# Altium PCB Controller_TRK_hv2.PcbDoc (part 2 of 2)
Units mm, origin at the board's own origin, x right, y up, seen from the top; angles counter-clockwise.
Board outline 95.06 x 95 mm, 2 copper layers (Top Layer, Bottom Layer); 179 components, 122 nets, 486 pads, 332 vias.
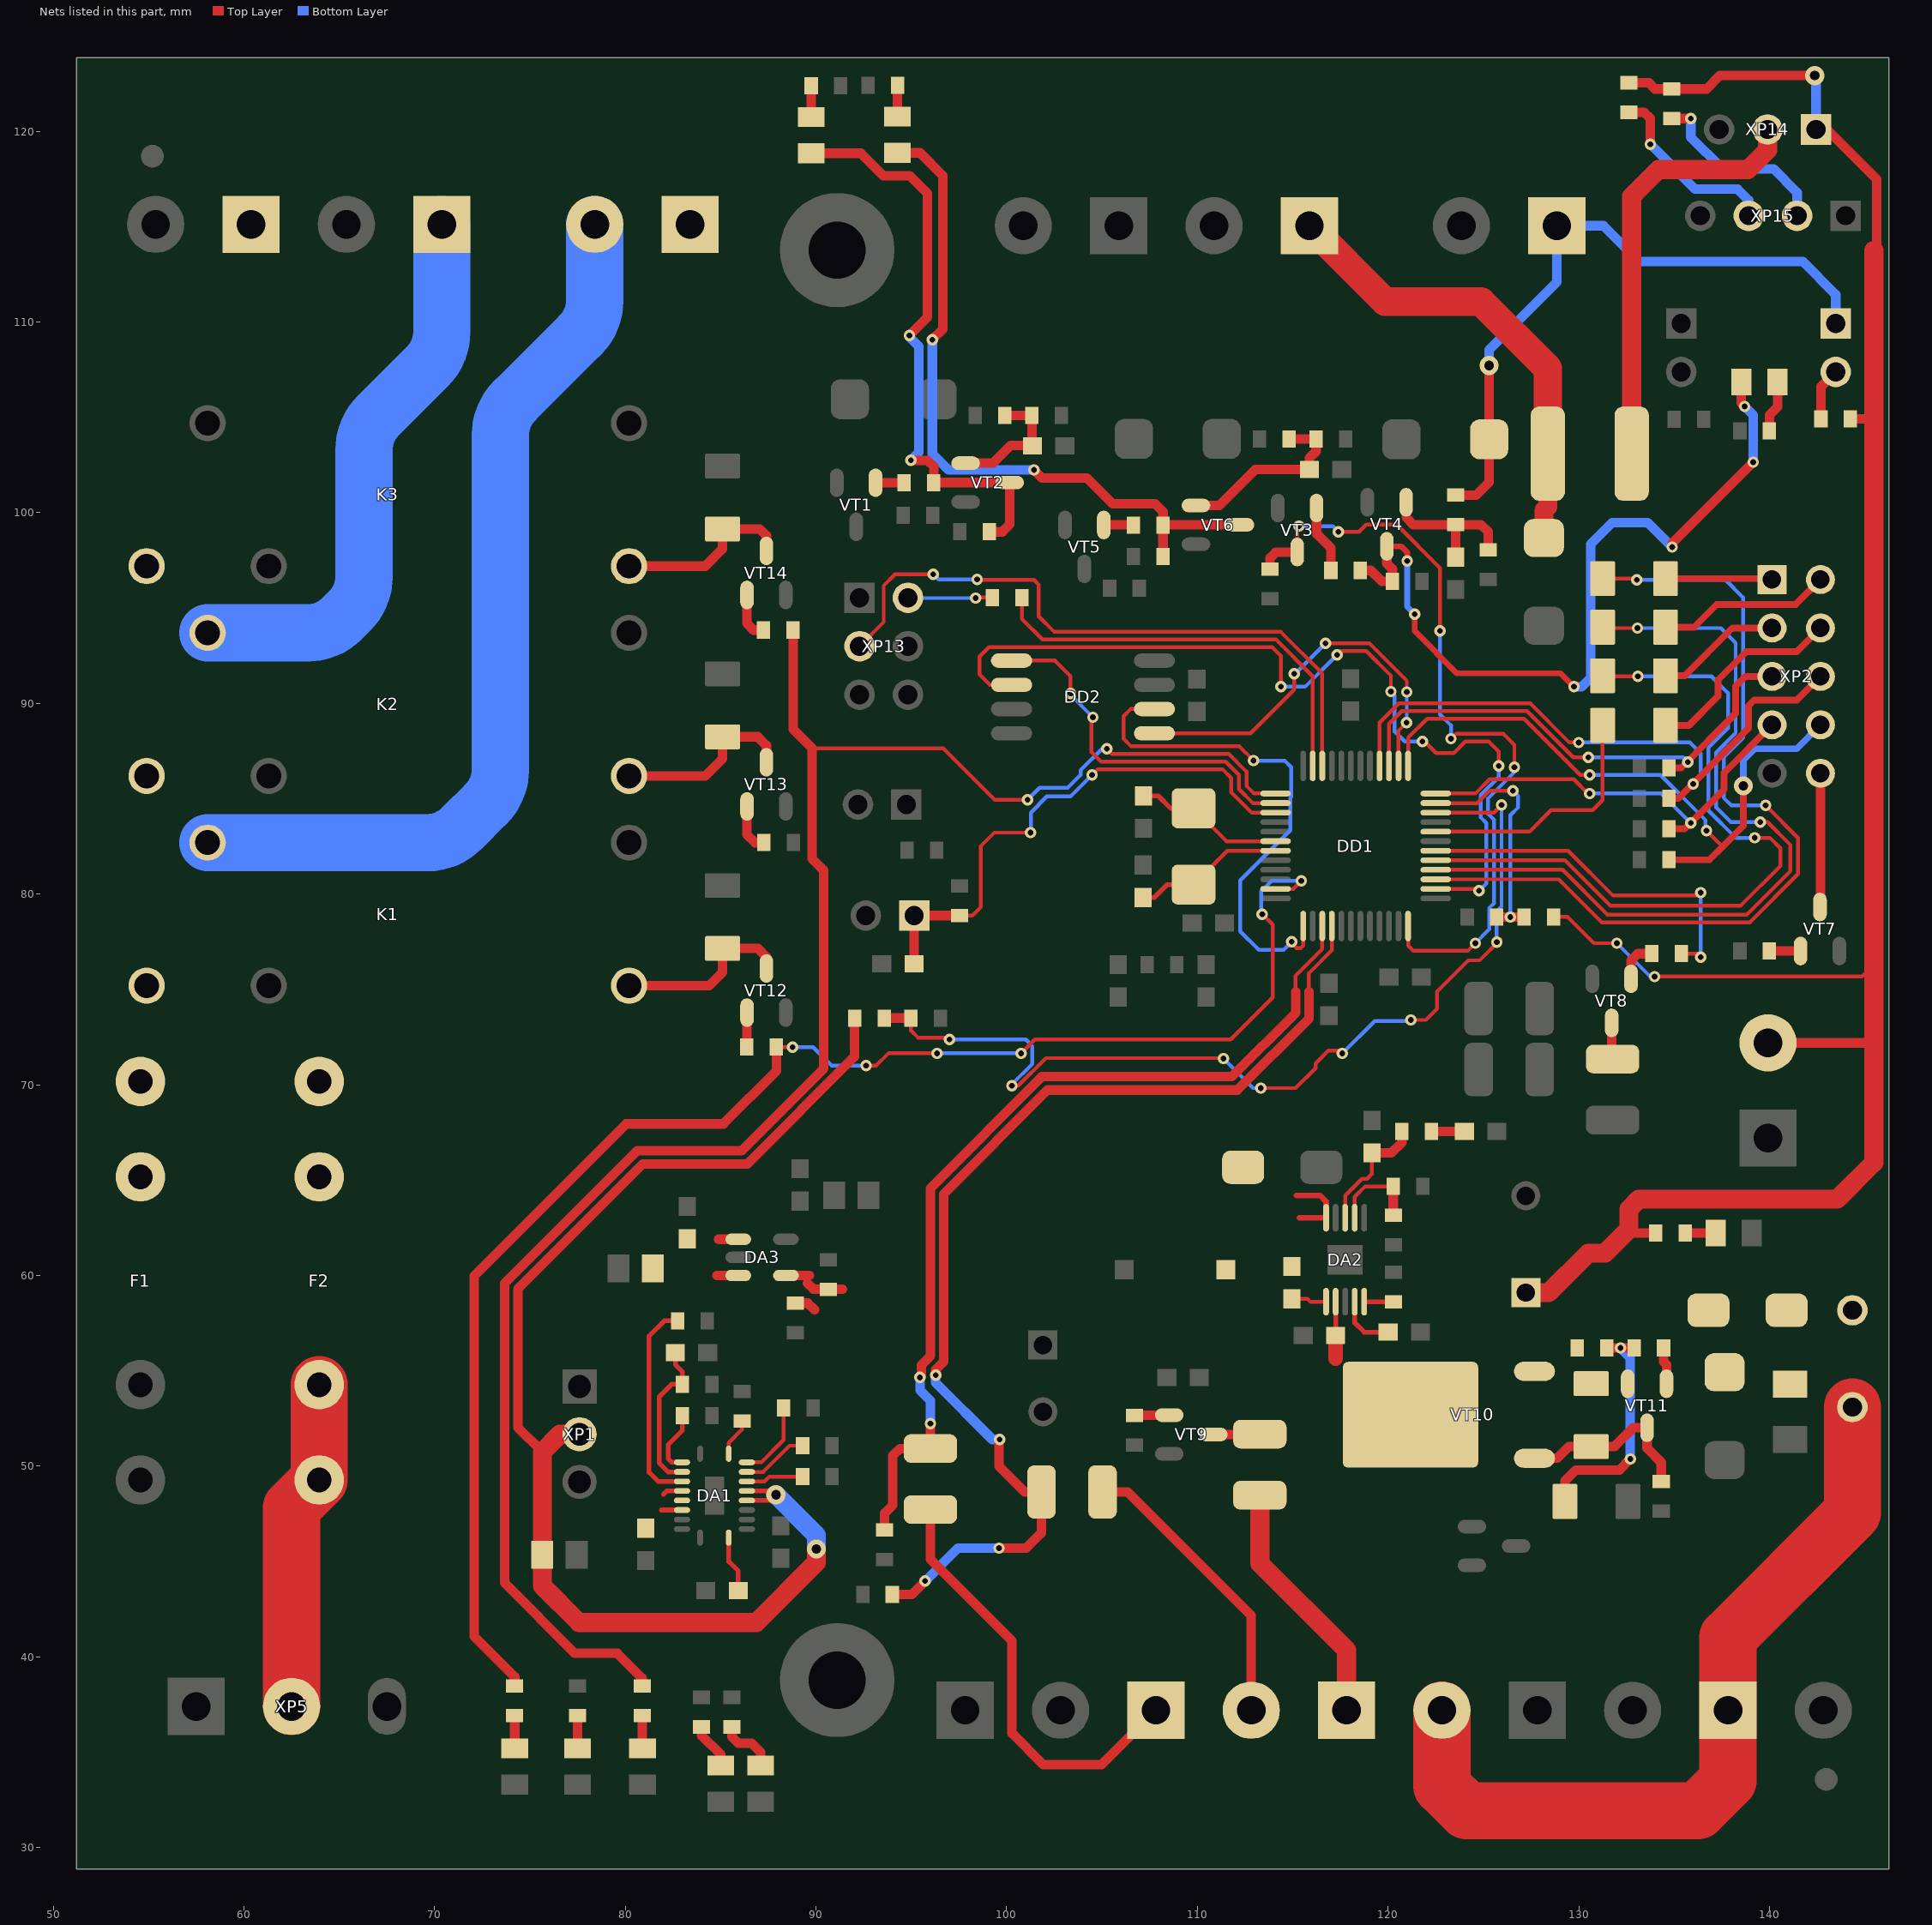
[diagram p2: the nets of this part, all layers, seen from the top]

## Via types
v1: diameter 0.6, hole 0.3, Top Layer to Bottom Layer, tented both sides, 300 vias
v2: diameter 1, hole 0.5, Top Layer to Bottom Layer, tented both sides, 32 vias

## Nets (pads, with @x,y where several pads share a name; then routed paths per layer and width w, separated by ;. In a path a pad name is that pad's centre, name@x,y a point inside that pad or via, vN(x,y) a via of type N, cw(c..) or ccw(c..) an arc to the next point about the centre after c; other vN are vias at no path point) (continued)
M_VALVE_RELAY: DD1.11 R51.1 R52.1 | length 81.6
  Top Layer w0.2: R51.1@87.925,71.975 v1(88.775,71.975) ; v1(92.625,71) 93.15,71 93.8,71.65 v1(96.35,71.65) ; v1(100.75,71.65) 101.475,72.375 111.75,72.375 113.95,74.575 113.95,78.4 v1(113.4,78.95) ; DD1.11@114.1,80.275 115.025,80.275 v1(115.45,80.7)
  Top Layer w0.5: R52.1@74.2,38.475 74.2,38.95 72.075,41.075 72.075,59.975 80.05,67.95 85.15,67.95 87.925,70.725 R51.1@87.925,71.975
  Bottom Layer w0.2: v1(88.775,71.975) 89.85,71.975 90.825,71 v1(92.625,71) ; v1(96.35,71.65) v1(100.75,71.65) ; v1(113.4,78.95) 113.35,78.9 113.35,80.15 113.9,80.7 v1(115.45,80.7)
MAIN_L: K2.11 XP7.1 | length 29.8
  Bottom Layer w3: K2.11@58.1,93.7 63.348,93.7 ccw(c63.348,96.24) 65.144,94.444 65.556,94.856 ccw(c63.76,96.652) 66.3,96.652 66.3,103.298 cw(c68.84,103.298) 67.044,105.094 69.631,107.681 ccw(c67.835,109.477) 70.375,109.477 XP7.1@70.375,115.125
MISO: DD1.26 DD2.2 | length 47.6
  Top Layer w0.2: DD2.2@100.232,90.95 DD2.2@100.257,90.975 99.125,90.975 98.575,91.525 98.575,92.45 99.075,92.95 113.925,92.95 114.375,92.5 v1(114.375,90.875) ; v1(117.325,92.55) 117.525,92.75 118.859,92.75 120.15,91.459 v1(120.15,90.625) ; v1(121.8,88) 121.8,88.075 121.825,88.1 122.525,87.4 123.45,87.4 124.05,88 125.275,88 125.8,87.475 v1(125.8,86.725) ; DD1.26@122.5,80.275 124.675,80.275 v1(124.775,80.175)
  Bottom Layer w0.2: v1(114.375,90.875) 115.65,90.875 v1(117.325,92.55) ; v1(120.15,90.625) 120.35,90.425 120.35,88.525 120.875,88 v1(121.8,88) ; v1(124.775,80.175) 125.15,80.55 125.15,83.734 124.85,84.034 124.85,85.191 125.8,86.141 v1(125.8,86.725)
MOSI: DD1.38 DD2.5 | length 21.1
  Top Layer w0.2: DD2.5@107.75,88.435 112.785,88.435 115.075,90.725 v1(115.075,91.55) ; v1(116.725,93.15) 119.025,93.15 120.981,91.194 v1(120.981,90.604) ; DD1.38@120.55,86.725 120.55,88.575 v1(120.975,89)
  Bottom Layer w0.2: v1(115.075,91.55) 115.125,91.55 v1(116.725,93.15) ; v1(120.975,89) 120.981,89.006 v1(120.981,90.604)
N: F2.1 XP5.2 | length 17.5
  Top Layer w3: XP5.2@62.5,37.4 62.5,47.825 F2.1@63.95,49.275 F2.1@63.95,54.275
N_OUT: F2.2 XP6.1 XP18.1
NetC1_1: C1.1 DA1.1 | length 3
  Top Layer w0.25: DA1.1@85.425,46.25 85.425,45 85.925,44.5 C1.1@85.925,43.475
NetC4_2: C4.2 DA1.5 DA1.6 R12.2 XP1.2 | length 67.3
  Top Layer w0.2: v2@87.6,48.2 v2(87.9,48.5) v2@87.7,48.7
  Top Layer w0.25: DA1.5@86.375,48.2 v2@87.6,48.2 ; DA1.6@86.375,48.7 v2@87.7,48.7
  Top Layer w0.5: 75.65,50.75 74.375,52.025 74.375,59.305 80.92,65.85 86.396,65.85 92.025,71.479 R12.2@92.025,73.5
  Top Layer w1: XP1.2@77.6,51.675 76.575,51.675 75.65,50.75 C4.2@75.65,45.35 75.65,43.725 77.575,41.8 86.875,41.8 90.025,44.95 v2(90.025,45.65)
  Bottom Layer w1: v2(87.9,48.5) 90.025,46.375 v2(90.025,45.65)
NetC5_1: C5.1 DA1.13 R7.1 | length 8.2
  Top Layer w0.25: C5.1@82.625,55.95 82.625,55.325 83,54.95 R7.1@83,54.3 82.45,54.3 81.775,53.625 81.775,50.175 82.25,49.7 DA1.13@82.975,49.7
NetC15_2: C15.2 R42.2 VD11.2 VD12.2 VD13.2 VT10.3 VT11.2
NetC16_1: C16.1 DA2.10 L1.1 VD16.2 | length 3.9
  Top Layer w0.3: 115.2,64.2 116.425,64.2 116.75,63.875 DA2.10@116.75,63.025 115.362,63.025
NetC16_2: C16.2 DA2.1 | length 1.8
  Top Layer w0.2: C16.2@114.95,58.775 115.775,58.775 115.925,58.625 DA2.1@116.725,58.625
NetC20_1: C20.1 DA2.4 | length 3.1
  Top Layer w0.25: DA2.4@118.275,58.075 118.275,58.322 118.25,58.347 118.25,57.525 118.75,57.025 C20.1@120,57.025
NetC21_1: C21.1 DA2.8 R46.2 | length 6.5
  Top Layer w0.2: DA2.8@117.75,63.025 117.75,64.191 118.634,65.075 118.9,65.075 119.15,65.325 C21.1@119.15,66.425
  Top Layer w0.5: C21.1@119.15,66.425 120.175,66.425 120.726,66.976 R46.2@120.726,67.55
NetC22_1: C22.1 R46.1 | length 1.7
  Top Layer w0.5: R46.1@122.275,67.55 C22.1@124,67.55
NetC28_2: C28.2 R21.2 R23.2 VT2.1 | length 6.9
  Top Layer w0.5: VT2.1@97.85,102.6 99.275,102.6 100.199,103.524 101.326,103.524 R23.2@101.326,105.1 R21.2@99.899,105.1
NetC29_2: C29.2 R27.2 R28.2 VT4.1 | length 8.1
  Top Layer w0.5: VT4.1@120.95,100.55 120.95,99.75 121.324,99.376 R27.2@123.55,99.376 ; C29.2@123.55,97.675 R27.2@123.55,99.376 ; R28.2@125.25,98.049 125.25,99 124.874,99.376 R27.2@123.55,99.376
NetC30_2: C30.2 R33.2 R34.2 VT6.1 | length 9.9
  Top Layer w0.5: VT6.1@109.925,100.382 111.157,100.382 113.05,102.275 C30.2@115.875,102.275 115.875,102.875 116.226,103.226 R34.2@116.226,103.875 R33.2@114.799,103.875
NetDA1_7: DA1.7 R2.1 | length 3
  Top Layer w0.2: DA1.7@86.375,49.2 87.3,49.2 87.55,49.45 R2.1@89.3,49.45
NetDA1_8: DA1.8 R5.1 | length 3.5
  Top Layer w0.2: DA1.8@86.375,49.7 87.234,49.7 88.609,51.075 R5.1@89.3,51.075
NetDA1_9: DA1.9 R3.1 | length 4.1
  Top Layer w0.2: DA1.9@86.375,50.2 87.125,50.2 88.3,51.375 R3.1@88.3,53.05
NetDA1_10: DA1.10 R6.1 | length 2
  Top Layer w0.2: DA1.10@85.425,50.65 85.425,51.225 86.125,51.925 R6.1@86.125,52.375
NetDA1_12: DA1.12 R4.1 | length 3.4
  Top Layer w0.25: DA1.12@82.975,50.2 82.45,50.2 82.25,50.4 82.25,51.125 83,51.875 R4.1@83,52.65
NetDA1_14: DA1.14 R1.1 | length 10.9
  Top Layer w0.25: R1.1@82.75,57.625 82.05,57.625 81.25,56.825 81.25,49.675 81.725,49.2 DA1.14@82.975,49.2
NetDA2_5: DA2.5 R47.2 | length 1.5
  Top Layer w0.25: DA2.5@118.75,58.625 R47.2@120.275,58.626
NetDA2_7: DA2.7 R45.1 R48.2 | length 4.9
  Top Layer w0.2: DA2.7@118.25,63.025 118.25,64.125 118.8,64.675 R45.1@120.275,64.675
  Top Layer w0.5: R48.2@120.275,63.149 R45.1@120.275,64.675
NetDA3_4: DA3.4 R49.1 R50.2 | length 4.4
  Top Layer w0.5: DA3.4@88.425,60 89.65,60 ; R50.2@88.925,58.549 89.575,58.549 89.925,58.2 ; 89.55,59.6 89.875,59.275 R49.1@90.65,59.275 91.4,59.275
NetDD1_27: DD1.27 VD6.2 | length 46.4
  Top Layer w0.2: DD1.27@122.5,80.775 128.95,80.775 131.2,78.525 138.975,78.525 141.5,81.05 141.5,82.95 v1(139.8,84.65) ; VD6.2@131.249,96.55 132.975,96.55 v1(133.05,96.475)
  Bottom Layer w0.2: v1(133.05,96.475) 137.7,96.475 138.625,95.55 138.625,88.2 137.6,87.175 137.6,85.05 138,84.65 v1(139.8,84.65)
NetDD1_28: DD1.28 VD8.2 | length 43
  Top Layer w0.2: DD1.28@122.5,81.275 129.15,81.275 131.5,78.925 138.809,78.925 141.1,81.216 141.1,82.575 139.9,83.775 v1(139.525,83.775) ; VD8.2@131.249,94 131.299,93.95 v1(133.075,93.95)
  Bottom Layer w0.2: v1(133.075,93.95) 137.45,93.95 138.225,93.175 138.225,88.45 137.2,87.425 137.2,84.55 137.975,83.775 v1(139.525,83.775)
NetDD1_29: DD1.29 VD7.2 | length 39
  Top Layer w0.2: DD1.29@122.5,81.775 129.275,81.775 131.65,79.4 138.5,79.4 140.575,81.475 140.575,82.4 140.021,82.954 v1(139.232,82.954) ; VD7.2@131.249,91.45 131.274,91.425 v1(133.1,91.425)
  Bottom Layer w0.2: v1(133.1,91.425) 136.95,91.425 137.825,90.55 137.825,88.7 136.8,87.675 136.8,84.384 138.23,82.954 v1(139.232,82.954)
NetDD1_30: DD1.30 R40.1 | length 19.4
  Top Layer w0.2: DD1.30@122.5,82.275 129.45,82.275 131.8,79.925 136.25,79.925 v1(136.4,80.075) ; R40.1@135.375,76.875 136.225,76.875 v1(136.4,76.7)
  Bottom Layer w0.2: v1(136.4,76.7) v1(136.4,80.075)
NetDD1_32: DD1.32 VD9.2 | length 13.4
  Top Layer w0.2: DD1.32@122.5,83.275 127.425,83.275 128.55,84.4 130.724,84.4 131.249,84.925 VD9.2@131.249,88.85
NetDD1_36: DD1.36 R37.2 XP2.7 | length 22.8
  Top Layer w0.2: DD1.36@122.5,85.275 124.575,85.275 125.325,86.025 129.734,86.025 130.484,85.275 v1(130.575,85.275)
  Top Layer w0.35: R37.2@134.724,83.425 135.55,83.425 137.625,85.5 137.625,86.365 XP2.7@140.135,88.875
  Bottom Layer w0.2: v1(130.575,85.275) 134.325,85.275 v1(135.875,83.725)
NetDD1_37: DD1.37 R36.2 XP2.8 | length 34.4
  Top Layer w0.2: DD1.37@121.05,86.725 121.05,88.2 122.05,89.2 127.125,89.2 130.075,86.25 v1(130.575,86.25) ; v1(136.7,83.325) 137.475,82.55 137.6,82.55
  Top Layer w0.35: R36.2@134.724,81.8 136.85,81.8 137.6,82.55 138.625,83.575 v2(138.625,85.675)
  Bottom Layer w0.2: v1(130.575,86.25) 134.275,86.25 136.65,83.875 136.65,83.375 v1(136.7,83.325)
  Bottom Layer w0.35: v2(138.625,85.675) 138.625,87.025 139.225,87.625 141.425,87.625 XP2.8@142.675,88.875
NetDD1_39: DD1.39 R39.2 XP2.5 | length 27.5
  Top Layer w0.2: DD1.39@120.05,86.725 120.05,88.924 120.726,89.6 127.291,89.6 129.716,87.175 v1(130.5,87.175)
  Top Layer w0.35: R39.2@134.724,86.625 135.375,86.625 138.225,89.475 138.225,90.9 138.74,91.415 XP2.5@140.135,91.415
  Bottom Layer w0.2: v1(130.5,87.175) 135.475,87.175 v1(135.725,86.925)
NetDD1_40: DD1.40 R38.2 XP2.6 | length 33.7
  Top Layer w0.2: DD1.40@119.55,86.725 119.55,88.989 120.561,90 127.456,90 129.506,87.95 v1(130,87.95)
  Top Layer w0.35: R38.2@134.724,85.025 135.225,85.025 138.898,88.698 138.898,89.873 139.203,90.178 141.438,90.178 XP2.6@142.675,91.415
  Bottom Layer w0.2: v1(130,87.95) 135.825,87.95 136.4,87.375 136.4,86.175 v1(136,85.775)
NetF1_2: F1.2 K1.14 K2.14 K3.14
NetFU1_1: FU1.1 XP12.1 | length 22.9
  Top Layer w0.5: FU1.1@96,47.725 96,45.125 100.275,40.85 100.275,36 101.925,34.35 104.975,34.35 XP12.1@107.825,37.2
NetFU2_1: FU2.1 XP12.2 | length 15.5
  Top Layer w0.5: FU2.1@105.025,48.65 106.35,48.65 112.825,42.175 XP12.2@112.825,37.2
NetFU5_1: FU5.1 VT8.3 | length 1.9
  Top Layer w0.5: VT8.3@131.725,73.25 131.725,71.4 FU5.1@131.775,71.35
NetFU6_1: FU6.1 XP14.2 | length 22.7
  Top Layer w1: FU6.1@132.775,103.1 132.775,116.592 134.183,118 138.875,118 139.9,119.025 XP14.2@139.9,120.1
NetFU7_1: FU7.1 VT9.3 | length 2.4
  Top Layer w0.5: VT9.3@110.836,51.659 113.259,51.659 FU7.1@113.275,51.675
NetFU7_2: FU7.2 XP16.1 | length 13.2
  Top Layer w1: FU7.2@113.275,48.475 113.275,44.9 117.825,40.35 XP16.1@117.825,37.2
NetFU8_2: FU8.2 VD11.1
NetJ4_2: J4.2 R22.1 | length 2.8
  Top Layer w0.5: R22.1@142.7,104.925 142.7,106.61 J4.2@143.475,107.385
NetK1_2: K1.2 VD17.1 VT12.3 | length 9.5
  Top Layer w0.5: K1.2@80.2,75.2 84.4,75.2 85.1,75.9 VD17.1@85.1,77.149 86.951,77.149 87.4,76.7 VT12.3@87.4,76.1
NetK2_2: K2.2 VD19.1 VT13.3 | length 9.8
  Top Layer w0.5: K2.2@80.2,86.2 84.2,86.2 85.1,87.1 VD19.1@85.1,88.249 86.951,88.249 87.4,87.8 VT13.3@87.4,86.911
NetK3_2: K3.2 VD20.1 VT14.3 | length 9.6
  Top Layer w0.5: K3.2@80.2,97.2 84.2,97.2 85.1,98.1 VD20.1@85.1,99.149 87.051,99.149 87.4,98.8 VT14.3@87.4,98
NetR8_1: R8.1 VD1.1 | length 2.4
  Top Layer w0.5: R8.1@84,36.325 84,35.875 85,34.875 VD1.1@85,34.3
NetR9_1: R9.1 VD2.1 | length 3.1
  Top Layer w0.5: R9.1@85.6,36.325 85.6,35.8 85.925,35.475 86.625,35.475 87.1,35 VD2.1@87.1,34.3
NetR10_2: R10.2 XP13.2 | length 4.4
  Top Layer w0.2: v1(98.375,95.525) 98.4,95.55 R10.2@99.251,95.55
  Bottom Layer w0.2: XP13.2@94.825,95.54 94.84,95.525 v1(98.375,95.525)
NetR17_1: R17.1 XP15.2 | length 10
  Top Layer w0.5: R17.1@134.875,120.675 v1(135.875,120.675)
  Bottom Layer w0.5: v1(135.875,120.675) 135.875,119.7 137.55,118.025 140.225,118.025 141.45,116.8 XP15.2@141.45,115.575
NetR19_1: R19.1 R20.1 VD23.2 VT2.3 | length 31.3
  Top Layer w0.5: VD23.2@89.75,118.85 92.35,118.85 93.525,117.675 94.925,117.675 95.85,116.75 95.85,110.25 v1(94.9,109.3) ; v1(94.975,102.75) 95.85,102.75 96.175,102.425 R20.1@96.175,101.575 96.184,101.584 99.15,101.584 VT2.3@100.161,101.584 100.161,99.386 99.775,99 R19.1@99.1,99
  Bottom Layer w0.5: v1(94.9,109.3) 94.9,109.214 95.4,108.714 95.4,103.175 v1(94.975,102.75)
NetR20_2: R20.2 VT1.1 | length 1.5
  Top Layer w0.5: VT1.1@93.125,101.575 R20.2@94.626,101.575
NetR25_1: R25.1 R26.1 VD24.2 VT4.3 | length 42.9
  Top Layer w0.3: VT4.3@119.934,98.239 120.686,98.239 121,97.925 v1(121,97.475) ; v1(121.4,94.675) 121.4,93.792 123.617,91.575 129.05,91.575 v1(129.75,90.875)
  Top Layer w0.5: R26.1@118.55,96.975 119.1,96.975 119.675,96.4 R25.1@120.225,96.4 120.225,97.05 119.934,97.341 VT4.3@119.934,98.239 ; v1(134.9,98.2) 134.9,98.4 v1(139.15,102.65) ; VD24.2@138.525,106.85 138.525,105.75 v1(138.7,105.575)
  Bottom Layer w0.3: v1(121,97.475) 121,95.075 v1(121.4,94.675)
  Bottom Layer w0.5: v1(129.75,90.875) 130.15,90.875 130.625,91.35 130.625,98.35 131.75,99.475 133.625,99.475 v1(134.9,98.2) ; v1(138.7,105.575) 139.15,105.125 v1(139.15,102.65)
NetR26_2: R26.2 VT3.1 | length 3.6
  Top Layer w0.5: VT3.1@116.25,100.25 116.25,98.9 117.001,98.149 R26.2@117.001,96.975
NetR29_1: R29.1 XP15.3 | length 10
  Top Layer w0.5: R29.1@132.625,121 133.425,121 133.75,120.675 v1(133.75,119.325) ; XP15.3@138.91,115.385 XP15.3@138.91,115.575
  Bottom Layer w0.5: v1(133.75,119.325) 136.1,116.975 138.325,116.975 138.91,116.39 XP15.3@138.91,115.575
NetR31_1: R31.1 R32.1 VD25.2 VT6.3 | length 37.4
  Top Layer w0.5: VD25.2@94.275,118.875 95.45,118.875 96.65,117.675 96.65,109.625 v1(96.1,109.075) ; v1(101.425,102.25) 101.85,101.825 104.214,101.825 105.564,100.475 107.775,100.475 108.2,100.05 R32.1@108.2,99.35 ; R31.1@108.2,97.7 R32.1@108.2,99.35 ; VT6.3@112.236,99.366 108.216,99.366 R32.1@108.2,99.35
  Bottom Layer w0.5: v1(96.1,109.075) 96.1,103.1 96.95,102.25 v1(101.425,102.25)
NetR32_2: R32.2 VT5.1 | length 1.6
  Top Layer w0.5: VT5.1@105.091,99.361 106.639,99.361 R32.2@106.651,99.35
NetR35_2: R35.2 VT7.1 | length 1.6
  Top Layer w0.5: R35.2@139.999,77.025 140.011,77.014 VT7.1@141.634,77.014
NetR40_2: R40.2 VT8.1 | length 2.2
  Top Layer w0.5: VT8.1@132.741,75.561 132.741,76.516 133.1,76.875 R40.2@133.826,76.875
NetR41_2: R41.2 VT9.1 | length 1.8
  Top Layer w0.5: R41.2@106.7,52.649 106.726,52.675 VT9.1@108.525,52.675
NetR42_1: R42.1 R43.2 VD15.2 | length 12.4
  Top Layer w0.5: VD15.2@129.274,48.15 129.274,49.224 129.85,49.8 132.125,49.8 v1(132.7,50.375) ; R42.1@131.475,56.2 v1(132.188,56.2) R43.2@132.901,56.2
  Bottom Layer w0.5: v1(132.188,56.2) 132.7,55.688 v1(132.7,50.375)
NetR43_1: R43.1 VT11.1 | length 1.9
  Top Layer w0.5: R43.1@134.45,56.2 134.45,55.475 134.6,55.325 VT11.1@134.6,54.325
NetR44_2: R44.2 VD13.1 VT10.1 VT11.3 | length 9.7
  Top Layer w0.5: VT10.1@127.675,50.415 128.865,50.415 129.474,51.024 VD13.1@130.65,51.024 131.874,51.024 132.864,52.014 VT11.3@133.584,52.014 133.584,50.941 134.325,50.2 R44.2@134.325,49.199
NetR51_2: R51.2 VT12.1 | length 1.8
  Top Layer w0.5: R51.2@86.376,71.975 86.384,71.983 VT12.1@86.384,73.789
NetR52_2: R52.2 VD18.1 | length 1.7
  Top Layer w0.5: VD18.1@74.2,35.2 R52.2@74.2,36.926
NetR53_2: R53.2 VT13.1 | length 2.5
  Top Layer w0.5: VT13.1@86.384,84.6 86.384,83.116 86.8,82.7 R53.2@87.275,82.7
NetR54_2: R54.2 VT14.1 | length 2.5
  Top Layer w0.5: VT14.1@86.384,95.689 86.384,94.191 86.725,93.85 R54.2@87.251,93.85
NetR55_2: R55.2 VD21.1 | length 1.7
  Top Layer w0.5: VD21.1@77.5,35.2 R55.2@77.5,36.926
NetR56_2: R56.2 VD22.1 | length 1.7
  Top Layer w0.5: VD22.1@80.9,35.2 R56.2@80.9,36.926
NetR58_1: R58.1 VD23.1 | length 1.7
  Top Layer w0.5: VD23.1@89.75,120.75 R58.1@89.75,122.4
NetR59_1: R59.1 VD24.1 | length 2.7
  Top Layer w0.5: R59.1@140,104.3 140,105.125 140.425,105.55 VD24.1@140.425,106.85
NetR60_1: R60.1 VD25.1 | length 1.7
  Top Layer w0.5: VD25.1@94.275,120.775 R60.1@94.275,122.425
NetR61_2: R61.2 VD26.1 | length 1.6
  Top Layer w0.5: R61.2@135.574,62.225 VD26.1@137.175,62.225
NetVD6_1: VD6.1 XP2.1 | length 5.6
  Top Layer w0.35: VD6.1@134.551,96.55 140.08,96.55 XP2.1@140.135,96.495 XP2.1@140.105,96.495
NetVD7_1: VD7.1 XP2.3 | length 6.6
  Top Layer w0.35: VD7.1@134.551,91.45 135.55,91.45 138.055,93.955 XP2.3@140.135,93.955
NetVD8_1: VD8.1 XP2.2 | length 9.2
  Top Layer w0.35: VD8.1@134.551,94 136.05,94 137.242,95.192 141.372,95.192 XP2.2@142.675,96.495
NetVD9_1: VD9.1 XP2.4 | length 10.7
  Top Layer w0.35: VD9.1@134.551,88.85 135.775,88.85 137.3,90.375 137.3,91.225 138.793,92.718 141.438,92.718 XP2.4@142.675,93.955
NetVT7_3: VT7.3 XP2.10 | length 7
  Top Layer w0.5: VT7.3@142.65,79.325 142.675,79.35 XP2.10@142.675,86.335
PISTOL: J4.1 R27.1 VD4.2 XP11.1 | length 34.6
  Top Layer w0.5: R27.1@123.55,100.925 124.625,100.925 125.3,101.6 VD4.2@125.3,103.85 v2(125.3,107.725)
  Bottom Layer w0.5: v2(125.3,107.725) 125.3,108.55 128.85,112.1 XP11.1@128.85,115.05 131.3,115.05 133.175,113.175 141.75,113.175 143.475,111.45 J4.1@143.475,109.925
PISTOL_MCU: DD1.24 R24.1 VT3.3 | length 41.3
  Top Layer w0.2: VT3.3@115.234,97.939 115.234,99.209 v1(115.325,99.3) ; v1(117.4,99) 118.475,99 118.85,99.375 120.45,99.375 122.725,97.1 v1(122.725,93.8) ; DD1.24@121.05,78.325 121.05,77.3 121.325,77.025 124.175,77.025 v1(124.575,77.425) ; v1(123.3,88.15) 123.55,88.4 126.05,88.4 126.625,87.825 v1(126.625,86.65)
  Top Layer w0.5: R24.1@113.8,97.05 113.8,97.625 114.114,97.939 VT3.3@115.234,97.939
  Bottom Layer w0.2: v1(115.325,99.3) 117.1,99.3 v1(117.4,99) ; v1(122.725,93.8) 122.725,89.425 123.3,88.85 v1(123.3,88.15) ; v1(124.575,77.425) 125.3,78.15 125.3,79.266 125.55,79.516 125.55,83.9 125.25,84.2 125.25,85.025 126.625,86.4 v1(126.625,86.65)
PUMP_L: K1.11 XP6.2 | length 47.8
  Bottom Layer w3: K1.11@58.1,82.7 69.623,82.7 ccw(c69.623,85.24) 71.419,83.444 72.706,84.731 ccw(c70.91,86.527) 73.45,86.527 73.45,104.073 cw(c75.99,104.073) 74.194,105.869 77.656,109.331 ccw(c75.86,111.127) 78.4,111.127 XP6.2@78.4,115.125
PUMP_RELAY: DD1.1 R54.1 R56.1 | length 98.6
  Top Layer w0.2: 89.8,87.65 96.675,87.65 99.375,84.95 v1(101.1,84.95) ; v1(105.25,87.625) 105.525,87.35 111.647,87.35 112.575,86.422 112.575,85.675 112.975,85.275 DD1.1@114.1,85.275
  Top Layer w0.5: R56.1@80.9,38.475 80.9,38.875 79.575,40.2 77.35,40.2 73.675,43.875 73.675,59.595 80.63,66.55 86.106,66.55 90.4,70.844 90.4,81.25 89.8,81.85 89.8,87.65 88.8,88.65 R54.1@88.8,93.85
  Bottom Layer w0.2: v1(101.1,84.95) 101.725,85.575 103.2,85.575 103.875,86.25 103.875,86.499 105.001,87.625 v1(105.25,87.625)
RESET: C12.2 DD1.3 J1.1 R15.2 | length 28.5
  Top Layer w0.2: R15.2@97.525,78.876 98.2,78.875 98.65,79.325 98.65,82.525 99.35,83.225 v1(101.25,83.225) ; v1(104.475,86.25) 104.775,86.55 111.316,86.55 111.775,86.091 111.775,85.344 112.844,84.275 DD1.3@114.1,84.275
  Top Layer w0.5: C12.2@95.15,76.35 J1.1@95.15,78.875 R15.2@97.525,78.876
  Bottom Layer w0.2: v1(101.25,83.225) 101.275,83.25 101.275,84.275 101.7,84.7 101.7,84.725 102.1,85.125 103.35,85.125 v1(104.475,86.25)
RXD: DD1.46 XP13.3 | length 34.9
  Top Layer w0.2: XP13.3@92.285,93 93.55,94.265 93.55,96.175 94.15,96.775 v1(96.15,96.775) ; v1(98.45,96.5) 98.475,96.475 101.425,96.475 101.675,96.225 101.675,94.575 102.5,93.75 114.375,93.75 116.55,91.575 DD1.46@116.55,86.725
  Bottom Layer w0.2: v1(96.15,96.775) 96.425,96.5 v1(98.45,96.5)
SCK: DD1.13 DD2.6 | length 27.3
  Top Layer w0.2: DD2.6@107.75,89.705 106.505,89.705 106.125,89.325 106.125,88.15 106.525,87.75 112.2,87.75 v1(112.95,87) ; v1@114.9,77.45 v1(114.95,77.5) 114.95,77.425 115.2,77.175 115.425,77.175 115.55,77.3 DD1.13@115.55,78.325
  Bottom Layer w0.2: v1(112.95,87) 114.575,87 114.925,86.65 114.925,85.1 114.875,85.05 114.875,83.344 112.25,80.719 112.25,78.05 113.225,77.075 114.525,77.075 v1(114.95,77.5)
SCL: DD1.15 FU1.2 R62.1 | length 48.4
  Top Layer w0.2: 115.15,74.875 115.15,75.716 116.55,77.116 DD1.15@116.55,78.325
  Top Layer w0.5: R62.1@93.6,46.65 93.6,47.532 94.025,47.957 94.025,50.55 94.4,50.925 FU1.2@96,50.925 v1(96,52.225) ; v1(95.455,54.653) 95.525,54.723 95.525,55.29 96,55.765 96,64.568 101.857,70.425 111.81,70.425 115.15,73.765 115.15,74.875
  Bottom Layer w0.5: v1(95.455,54.653) 95.455,53.97 96,53.425 v1(96,52.225)
SDA: DD1.16 FU2.2 R63.1 | length 58.3
  Top Layer w0.2: 115.85,75.125 115.85,75.85 117.05,77.05 DD1.16@117.05,78.325
  Top Layer w0.5: R63.1@94,43.275 95.025,43.275 v1(95.725,43.975) ; v1(96.275,54.775) 96.275,55.05 96.7,55.475 96.7,64.278 102.147,69.725 112.1,69.725 115.85,73.475 115.85,74.875 ; v1(99.6,45.7) 101.025,45.7 101.825,46.5 FU2.2@101.825,48.65 100.95,48.65 99.6,50 99.6,51.375 v1(99.625,51.4)
  Bottom Layer w0.5: v1(95.725,43.975) 97.45,45.7 v1(99.6,45.7) ; v1@96.275,54.825 v1(96.275,54.775) 96.275,54.375 99.25,51.4 v1(99.625,51.4)
SS: DD1.2 DD2.1 | length 19.1
  Top Layer w0.2: DD2.1@100.257,92.245 102.53,92.245 103.35,91.425 v1(103.35,90.525) ; v1(104.525,89.275) 104.45,89.2 104.45,87.45 104.95,86.95 111.481,86.95 112.175,86.256 112.175,85.509 112.909,84.775 DD1.2@114.1,84.775
  Bottom Layer w0.2: v1(103.35,90.525) 103.35,90.45 v1(104.525,89.275)
TXD: DD1.47 R10.1 | length 22.3
  Top Layer w0.2: R10.1@100.8,95.55 100.8,94.425 101.875,93.35 114.125,93.35 116.05,91.425 DD1.47@116.05,86.725
V_IN: DD1.35 R11.1 R13.2 | length 12.7
  Top Layer w0.2: DD1.35@122.5,84.775 124.675,84.775 125.325,85.425 v1(126.55,85.425)
  Top Layer w0.5: R13.2@125.699,78.8 v1(126.412,78.8) R11.1@127.125,78.8
  Bottom Layer w0.2: v1(126.412,78.8) 126.412,84.137 126.825,84.55 126.825,85.15 v1(126.55,85.425)
V_SYS: DD1.34 R12.1 R14.2 | length 52.8
  Top Layer w0.2: R14.2@94.975,73.5 94.975,72.85 95.35,72.475 v1@96.95,72.475 ; v1(100.275,69.95) 100.604,69.95 102.054,71.4 v1@111.15,71.4 ; v1(113.325,69.825) 115.15,69.825 116.2,70.875 116.2,71.125 116.875,71.8 117.45,71.8 v1(117.6,71.65) ; v1(121.2,73.4) 121.984,73.4 122.575,73.991 122.575,74.895 124.205,76.525 124.8,76.525 v1@125.887,77.612 ; DD1.34@122.5,84.275 125.55,84.275 v1(125.95,84.675)
  Top Layer w0.5: R12.1@93.574,73.5 R14.2@94.975,73.5
  Bottom Layer w0.2: v1(97,72.375) 101,72.375 101.35,72.025 101.35,71.1 100.275,70.025 v1(100.275,69.95) ; v1(111.375,71.375) 112.925,69.825 v1(113.325,69.825) ; v1(117.6,71.65) 119.3,73.35 121.15,73.35 v1(121.2,73.4) ; v1(125.7,77.475) 125.7,79.1 125.95,79.35 v1(125.95,84.675)
VBAT: C2.1 C25.2 C26.1 DA1.15 DA1.16 DA1.17 DA3.1 DA3.3 | length 4.3
  Top Layer w0.25: 81.9,47.7 DA1.17@82.975,47.7 ; 82,48.525 82.175,48.7 DA1.15@82.975,48.7
  Top Layer w0.5: 84.8,60 DA3.3@85.925,60 ; 84.9,61.9 DA3.1@85.925,61.9
VIN: FU8.1 XP3.1 XP16.2 | length 42.5
  Top Layer w3: XP16.2@122.825,37.2 122.825,33.225 124.125,31.925 136.25,31.925 137.825,33.5 XP3.1@137.825,37.2 137.825,41.025 144.35,47.55 FU8.1@144.35,53.095
VIN_F: C19.1 C27.2 DA2.2 R11.2 R17.2 R22.2 R29.2 R61.1 VT10.2 XP8.2 XP14.1 | length 119.8
  Top Layer w0.2: R11.2@128.674,78.8 129.425,78.8 130.8,77.425 v1(132,77.425) ; v1(133.975,75.675) 144.85,75.675 145.075,75.9
  Top Layer w0.25: C19.1@117.25,56.85 DA2.2@117.25,58.625
  Top Layer w0.5: 132.625,62.425 132.825,62.225 R61.1@134.025,62.225 ; R29.2@132.625,122.549 133.676,122.549 134.001,122.224 R17.2@134.875,122.224 136.699,122.224 137.4,122.925 v2(142.375,122.925) ; 134.65,63.95 134.7,64 ; XP8.2@139.925,72.2 145.475,72.2 ; XP14.1@142.44,120.1 143.025,120.1 145.625,117.5 145.625,113.75 ; R22.2@144.249,104.925 145.475,104.925 ; 145.4,87.625 145.475,87.55
  Top Layer w0.75: 117.25,55.625 C19.1@117.25,56.85
  Top Layer w1: C27.2@127.225,59.1 128.425,59.1 130.5,61.175 131.375,61.175 132.625,62.425 132.625,63.475 133.15,64 134.7,64 143.55,64 145.475,65.925 145.475,72.2 145.475,87.55 145.475,104.925 145.475,113.75
  Bottom Layer w0.2: v1(132,77.425) 133.75,75.675 v1(133.975,75.675)
  Bottom Layer w0.5: v2(142.375,122.925) 142.44,122.86 XP14.1@142.44,120.1
VOUT_5_12: FU6.2 VD14.2 XP17.1 | length 24.6
  Top Layer w1: VD14.2@128.175,98.675 128.175,100.125 128.375,100.325 FU6.2@128.375,103.1
  Top Layer w1.5: XP17.1@115.875,115.05 119.85,111.075 124.875,111.075 128.375,107.575 FU6.2@128.375,103.1
XTAL1: C14.2 DD1.6 QR1.1 | length 7.9
  Top Layer w0.2: QR1.1@109.8,84.5 111.525,82.775 DD1.6@114.1,82.775
  Top Layer w0.25: C14.2@107.175,85.15 107.95,85.15 108.6,84.5 QR1.1@109.8,84.5
XTAL2: C13.2 DD1.7 QR1.2 | length 8
  Top Layer w0.2: QR1.2@109.8,80.5 111.575,82.275 DD1.7@114.1,82.275
  Top Layer w0.25: C13.2@107.15,79.825 107.75,79.825 108.425,80.5 QR1.2@109.8,80.5
pads on no net: DA1.2 DA1.3 DA1.18 DA2.3 DA2.6 DD1.14 DD1.22 DD1.23 DD1.42 DD1.43 K1.12 K2.12 K3.12 REP1.1 REP2.1 XP1.3 XP13.1 XP13.4 XP13.6

## Polygon pours and split planes (outlines as drawn)
GND on Top Layer "GND_L01_P056" (hatched 90Degree grid 0.2 track 0.5, remove dead copper, pour order 56): 69.25,28.877 69.25,64.4 73.175,68.325 82.875,68.325 85.55,71 85.55,105.35 87.475,107.275 93.65,107.275 96.875,109.1 96.875,123.877 146.275,123.877 146.275,28.877
+3V3 on Top Layer "+3V3_L01_P052" (hatched 90Degree grid 0.2 track 0.5, remove dead copper, pour order 52): 87.45,63.75 88.4,64.7 89.675,64.7 90.025,64.35 90.025,63.5 90.375,63.15 91.6,63.15 91.825,62.925 91.825,60.725 91.4,60.3 89.625,60.3 88.75,61.175 87.85,61.175 87.45,61.575
VBAT on Top Layer "VBAT_L01_P036" (hatched 90Degree grid 0.2 track 0.5, remove dead copper, pour order 36): 81.275,48.825 80.675,49.425 80.675,57.225 82.125,58.675 84.225,58.675 84.8,59.25 84.8,62.3 84.3,62.8 82.075,62.8 80.6,61.325 80.6,59.6 79.125,58.125 79.125,49.2 79.1,49.175 79.1,46.475 79.712,46.312 81.9,46.312 82.15,46.925 82.15,48.75 82.075,48.825
NetDA3_4 on Top Layer "NETDA3_4_L01_P038" (hatched 90Degree grid 0.2 track 0.5, remove dead copper, pour order 38): 89.35,60.575 89.975,59.95 91.15,59.95 91.65,59.45 91.65,58.475 91.075,57.9 88.45,57.9 88.1,58.25 88.1,59.05 87.525,59.625 87.525,60.425 87.675,60.575
+3V3_F on Top Layer "+3V3_F_L01_P042" (hatched 90Degree grid 0.2 track 0.5, remove dead copper, pour order 42): 112.325,77.45 112.325,76.65 112.325,75.7 112.325,75.3 110.175,75.3 109.575,75.9 109.575,77.45
NetC16_1 on Top Layer "NETC16_1_L01_P034" (hatched 90Degree grid 0.2 track 0.5, remove dead copper, pour order 34): 115.9,63.5 114.35,65.05 114.35,66.65 113.85,67.15 111.25,67.15 109.975,65.875 109.975,56.575 110.4,56.15 112.05,56.15 113.9,58 113.9,59.2 114.3,59.6 115.5,59.6 115.9,60
+5V on Top Layer "+5V_L01_P032" (hatched 90Degree grid 0.2 track 0.5, remove dead copper, pour order 32): 107.75,59.825 107.725,59.85 107.725,64.425 107.1,65.05 105.85,65.05 103.225,62.425 103.225,59.75 102,58.525 100.55,58.525 99.575,57.55 99.575,55.375 100.15,54.8 105.375,54.8 106.55,53.625 108.725,53.625 109.2,54.1 109.2,55.575 107.75,57.025
NetC15_2 on Top Layer "NETC15_2_L01_P022" (hatched 90Degree grid 0.2 track 0.5, remove dead copper, pour order 22): 136.85,53.025 135.575,54.3 135.575,56.7 135.05,57.225 131.125,57.225 130.7,56.8 130.7,55.675 131.05,55.325 132.95,55.325 133.3,54.975 133.3,53.425 132.8,52.925 129.4,52.925 128.45,53.875 126.375,53.875 125.85,54.4 125.85,56.1 126.55,56.8 128.025,56.8 129.95,58.725 133.375,58.725 134.475,59.825 137.625,59.825 138.225,59.225 138.225,56.775 139.225,55.775 142.4,55.775 142.725,55.45 142.725,53.825 141.925,53.025
NetFU8_2 on Top Layer "NETFU8_2_L01_P018" (hatched 90Degree grid 0.2 track 0.5, remove dead copper, pour order 18): 139.65,56.275 138.775,57.15 138.775,59.9 139.7,60.825 145.525,60.825 146.275,60.075 146.275,56.275
EARTH on Top Layer "EARTH_L01_P010" (hatched 90Degree grid 0.2 track 0.5, remove dead copper, pour order 10): 66.5,37.9 66.5,35.6 62.7,31.8 62.7,28.877 68.5,28.877 68.5,37.9
NetF1_2 on Top Layer "NETF1_2_L01_P002" (hatched 90Degree grid 0.2 track 0.5, remove dead copper, pour order 2): 57,63 57,71.325 57,74.7 57,79.7 55.5,81.2 55.5,83.7 57,85.2 57,91.2 56,92.2 56,95.7 57.1,96.8 57.1,99.1 56,100.2 53.1,100.2 52,99.1 52,63.5 52.5,63
VIN_F on Top Layer "VIN_F_L01_P050" (hatched 90Degree grid 0.2 track 0.5, remove dead copper, pour order 50): 115.35,51.575 115.35,55.25 116,55.9 123.6,55.9 125.125,57.425 125.125,60.1 126.25,61.225 128.35,61.225 129.175,60.4 129.175,57.75 127.75,56.325 126.75,56.325 125.95,55.525 125.95,49.65 127.925,47.675 127.925,44.9 129.85,42.975 129.85,41.25 128.075,39.475 124,39.475 122.2,37.675 120.625,37.675 119.725,38.575 119.725,39.6 114.85,44.475 114.85,46.9 115.325,47.375 115.325,48.175 115.375,48.225
L_IN on Top Layer "L_IN_L01_P058" (solid, pour order 58): 58.9,41.575 57.6,50.475 57.6,55.475 56.5,56.575 51.213,56.575 51.213,32.775 51.388,32.6 58.9,32.6
N_OUT on Top Layer "N_OUT_L01_P062" (solid, pour order 62): 61.1,62.575 61.1,71.575 63.725,73.625 66.175,75.15 67.4,76.1 67.4,103.9 63.9,105.875 60.25,107.475 57.8,109.925 57.8,117.2 58.325,117.725 61.3,117.725 62.5,116.525 62.375,111.375 65.65,111.375 79.05,111.375 81.5,111.375 81.5,117.475 82.075,118.05 85.3,118.05 86.375,116.975 86.375,110.475 83.5,107.6 75.35,106.475 72.4,104.375 72.4,73.875 65.225,66.7 65.225,62.575
GND on Bottom Layer "GND_L02_P054" (hatched 90Degree grid 0.2 track 0.5, remove dead copper, pour order 54): 69.25,28.877 69.25,64.4 73.175,68.325 82.875,68.325 85.55,71 85.55,105.35 87.475,107.275 93.65,107.275 95.375,109 95.375,123.877 146.275,123.877 146.275,28.877
+3V3_F on Bottom Layer "+3V3_F_L02_P044" (hatched 90Degree grid 0.2 track 0.5, remove dead copper, pour order 44): 110.775,77.6 111.075,77.9 111.75,77.9 112.175,77.475 112.175,75.175 111.925,74.925 111.375,74.925 110.775,75.525
EARTH on Bottom Layer "EARTH_L02_P016" (hatched 90Degree grid 0.2 track 0.5, remove dead copper, pour order 16): 68.5,37.5 68.5,28.877 62.5,28.877 62.5,32 66.5,36 66.5,37.7

## Keep-outs
Keep-Out Layer:
  lines w0.2: 51.213,28.877 51.213,123.877 146.275,123.877 146.275,28.877 51.213,28.877 ; 76.4,72.5 76.4,105.375 78.4,105.375 78.4,72.5 76.4,72.5
  lines w0.254: 59.375,33.875 60.625,33.875 60.625,72.5 59.375,72.5 59.375,33.875

## Other copper
Top Layer:
  pour cut-out: 122.325,76.55 122.45,76.675 123.175,76.675 123.275,76.575 123.275,76.175 123.225,76.175 122.875,75.825 122.85,75.85 122.325,75.85
  pour cut-out: 119.525,77.25 120.75,77.25 121.2,76.8 121.2,76.3 121.025,76.125 119.9,76.125 119.575,76.45
  pour cut-out: 129.375,105.375 131.7,105.375 131.7,100.8 129.4,100.8 129.375,100.825
  pour cut-out: 130.4,70.45 133.15,70.45 133.15,69.075 130.4,69.075
  pour cut-out: 127.05,72.2 127.05,69.45 125.675,69.45 125.675,72.2
  pour cut-out: 127.05,75.35 127.05,72.6 125.675,72.6 125.675,75.35
  pour cut-out: 97.375,48.65 94.625,48.65 94.625,50.025 97.375,50.025
  pour cut-out: 102.725,47.225 102.725,49.975 104.1,49.975 104.1,47.225
  pour cut-out: 111.875,50.75 114.625,50.75 114.625,49.375 111.875,49.375
  pour cut-out: 83.325,49.875 83.325,51.4 85.125,51.4 85.125,49.875
  pour cut-out: 81.975,47.212 85.462,47.212 85.425,46.862 85.425,45.65 85.225,45.45 83.7,45.45 83.4,45.75 83.4,46.075 83.137,46.013 81.975,46.013
  pour cut-out: 116.85,62.325 117.65,62.325 117.65,62.2 116.85,62.2
  pour cut-out: 124.175,46.875 124.175,44.625 127.225,44.625 127.8,45.2 127.8,46.7 127.7,46.7 127.475,46.925

## Silkscreen, mask and mechanical layers (free items; w line width, h text height)
Top Overlay:
  lines w0.2: 53.925,122.575 55.025,122.575 ; 54.225,122.875 55.725,122.875 ; 54.425,123.175 55.525,123.175 ; 55.025,121.875 55.025,122.575 ; 56.025,122.575 55.025,122.575 ; 66.6,30.1 67.6,30.1 ; 66.9,29.8 68.4,29.8 ; 67.1,29.5 68.2,29.5 ; 67.6,30.8 67.6,30.1 ; 68.7,30.1 67.6,30.1
  lines w0.25: 52.275,106.523 72.875,106.523 72.875,108.925 ; 52.275,106.548 52.275,108.925 ; 70.6,43.6 70.6,46.6 ; 75.3,108.925 75.3,106.548 85.9,106.548 85.9,108.925 ; 95.3,43.4 95.3,46.7 123.25,46.7 123.25,43.4 ; 97.775,108.85 97.775,106.3 118.375,106.3 118.375,108.85 ; 120.75,108.85 120.75,106.325 131.35,106.325 131.35,108.85 ; 128.95,43.375 128.95,46.7 145.8,46.7 145.8,43.4 ; 139.925,121.4 139.925,123.25 ; 140.2,112.325 140.2,114.305
  lines w0.254: 54.4,43.6 51.575,43.6 51.575,44 51.575,46.6 70.6,46.6 ; 62.275,121.425 62.275,123.575 ; 67.75,121.425 67.75,123.525 ; 80.8,121.4 80.8,123.65
  text "VLV_N" at 61.925,122.975 h1 r180
  text "LFL_L" at 67.3,122.975 h1 r180
  text "MN_L" at 72.15,122.975 h1 r180
  text "PMP_L" at 80.05,122.975 h1 r180
  text "PMP_N" at 85.85,122.975 h1 r180
  text "CNT_1" at 102.475,122.975 h1 r180
  text "CNT_2" at 107.9,122.975 h1 r180
  text "GND" at 111.825,122.975 h1 r180
  text "VOUT" at 117.275,122.975 h1 r180
  text "GND" at 124.75,122.975 h1 r180
  text "PISTOL" at 131.225,122.975 h1 r180
  text "+5V" at 139.05,122.925 h1 r180
  text "+12V" at 143.9,122.925 h1 r180
  text "VOUT" at 141.525,118.475 h1 r180
  text "CNT_1" at 88.4,116.775 h1 r90
  text "CNT_2" at 96.525,116.775 h1 r90
  text "CNT2_P" at 139.85,113.75 h1 r180
  text "CNT1_P" at 146.025,113.75 h1 r180
  text "VALVE" at 66.825,108.525 h1.5 r180
  text "PUMP" at 84.7,108.5 h1.5 r180
  text "PISTOL" at 130,108.4 h1.5 r180
  text "COUNTERS" at 114.2,108.275 h1.5 r180
  text "PISTOL" at 137.375,108 h0.8
  text "M/S" at 133.375,107.35 h1 r90
  text "PISTOL" at 145.925,106.4 h0.8 r90
  text "KEYBOARD" at 134.3,79.8 h1
  text "+12V" at 145.875,75.85 h1 r90
  text "CONTROLLER TRK hv2" at 73.625,67.4 h2
  text "PULSE" at 141.2,63.275 h1
  text "PWR" at 139.95,61.6 h0.8
  text "+" at 101.45,58.9 h1.52
  text "5x20mm" at 71.45,55.5 h1.5 r90
  text "+" at 128.125,55.25 h1.52
  text "FUSE 10A 250V" at 69.025,50.475 h1.5 r90
  text "BATTERY" at 73.85,46.825 h1.5 r90
  text "7-SEG DISPLAY" at 100.45,44.35 h1.5
  text "S6 CONNECTOR" at 129.95,44.35 h1.3
  text "220V  AC IN" at 52.825,44.325 h1.5
  text "PUMP" at 79.6,32.6 h0.8 r90
  text "MAIN_VALVE" at 72.95,32.45 h0.8 r90
  text "ERROR" at 83.7,31.4 h0.8 r90
  text "STATE" at 89.2,31.4 h0.8 r90
  text "LFL_VALVE" at 76.2,30.4 h0.8 r90
  text "L" at 57.4,29.6 h1
  text "N" at 62.2,29.6 h1
  text "GND" at 96.4,29.475 h1
  text "+5V" at 101.2,29.475 h1
  text "SCL" at 106.7,29.475 h1
  text "SDA" at 111.5,29.475 h1
  text "BL" at 117.3,29.475 h1
  text "+12V" at 121,29.475 h1
  text "CANH" at 126.25,29.475 h1
  text "CANL" at 131.45,29.475 h1
  text "VIN" at 136.9,29.475 h1
  text "GND" at 141.8,29.475 h1
Mechanical 2:
  lines w0.254: 91.113,38.777 91.113,38.062 114.475,14.7 ; 92.875,34.15 92.875,36.275 94.85,36.275
  text "2xD3mm" at 115.6,14.075 h1.52

## Dimensions
146.275,28.877 to 91.113,38.777 on Mechanical 2
91.113,113.777 to 51.213,123.877 on Mechanical 2
91.113,38.777 to 51.213,28.877 on Mechanical 2
91.113,38.777 to 91.113,113.777 on Mechanical 2
91.113,38.777 to 51.213,28.877 on Mechanical 2
146.275,28.877 to 146.275,123.877 on Mechanical 2
51.213,123.877 to 146.275,123.877 on Mechanical 2